# Altium PCB PCB1.PcbDoc
Units mil, origin at the board's own origin, x right, y up, seen from the top; angles counter-clockwise.
Board outline 2735 x 3655 mil, 2 copper layers (Top Layer, Bottom Layer); 9 components, 46 nets, 93 pads, 26 vias.
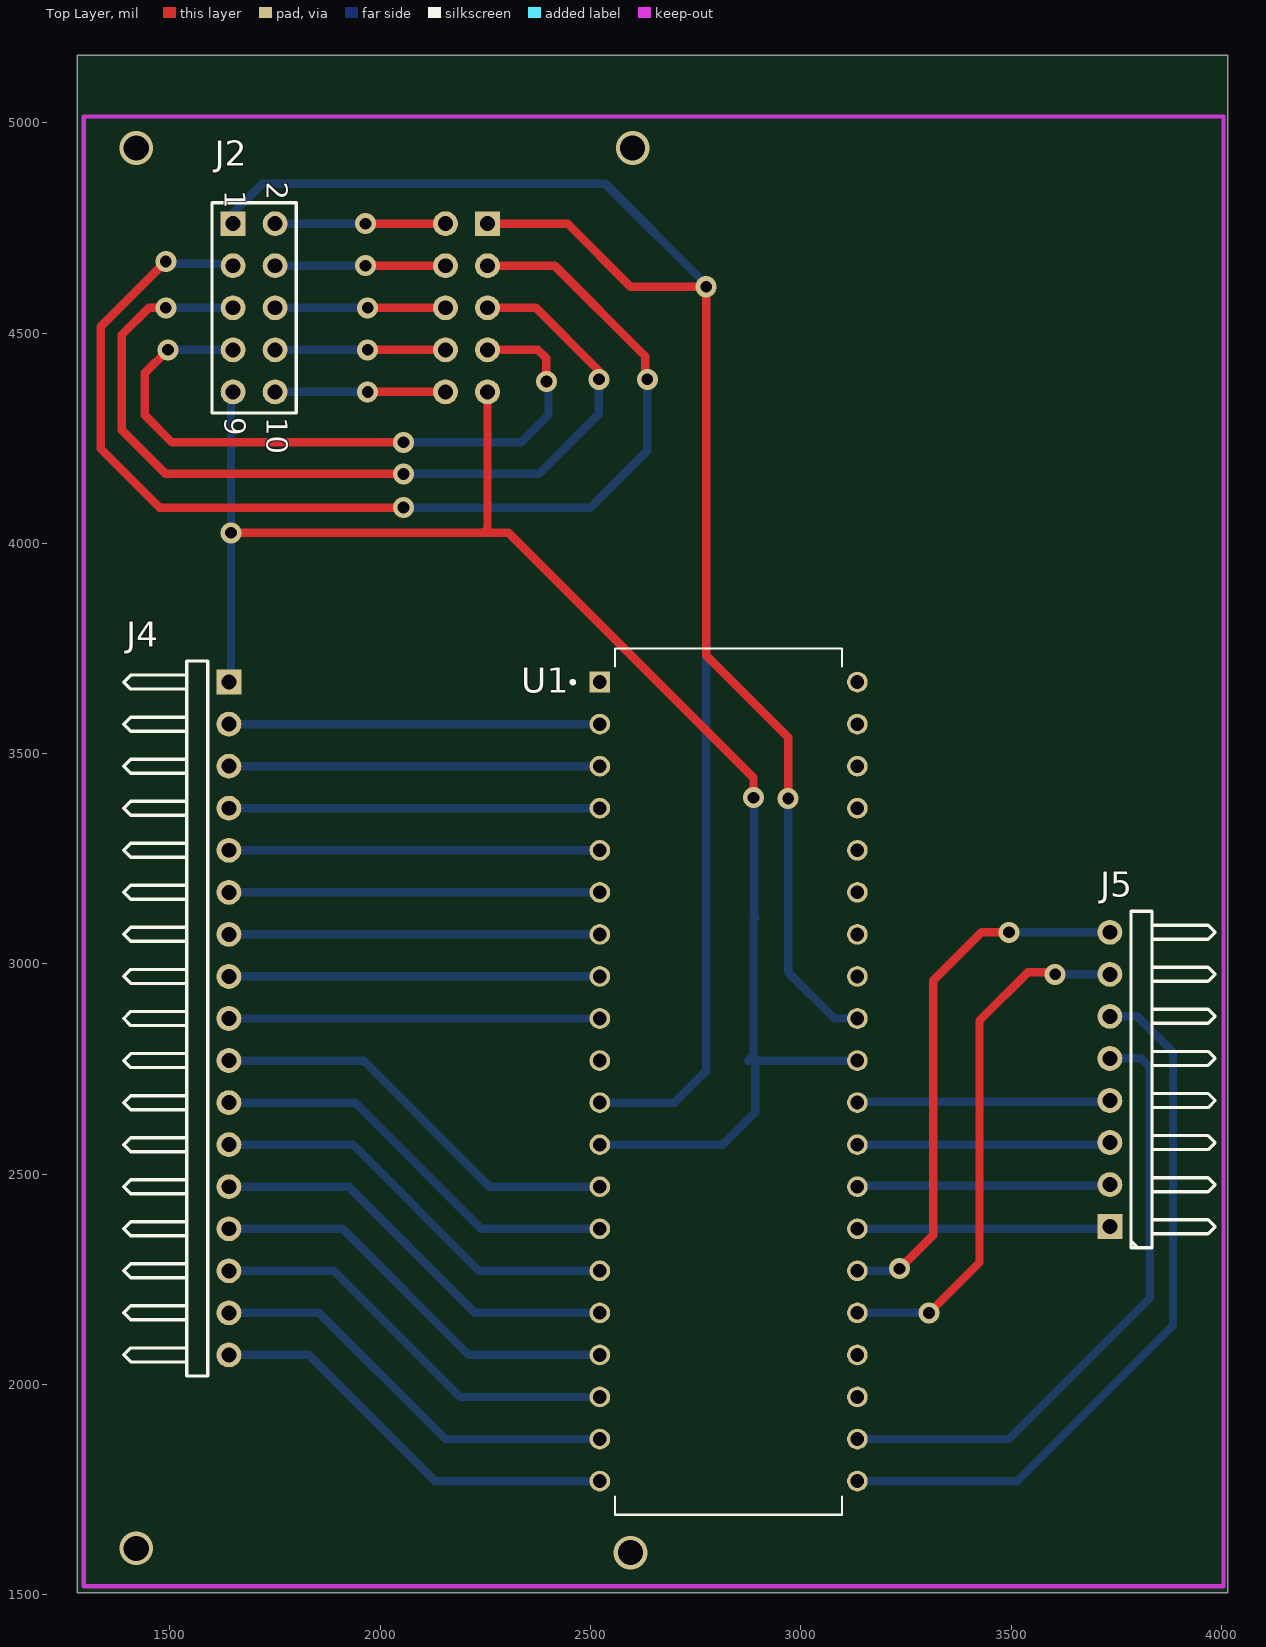
[diagram p0: Top Layer view]
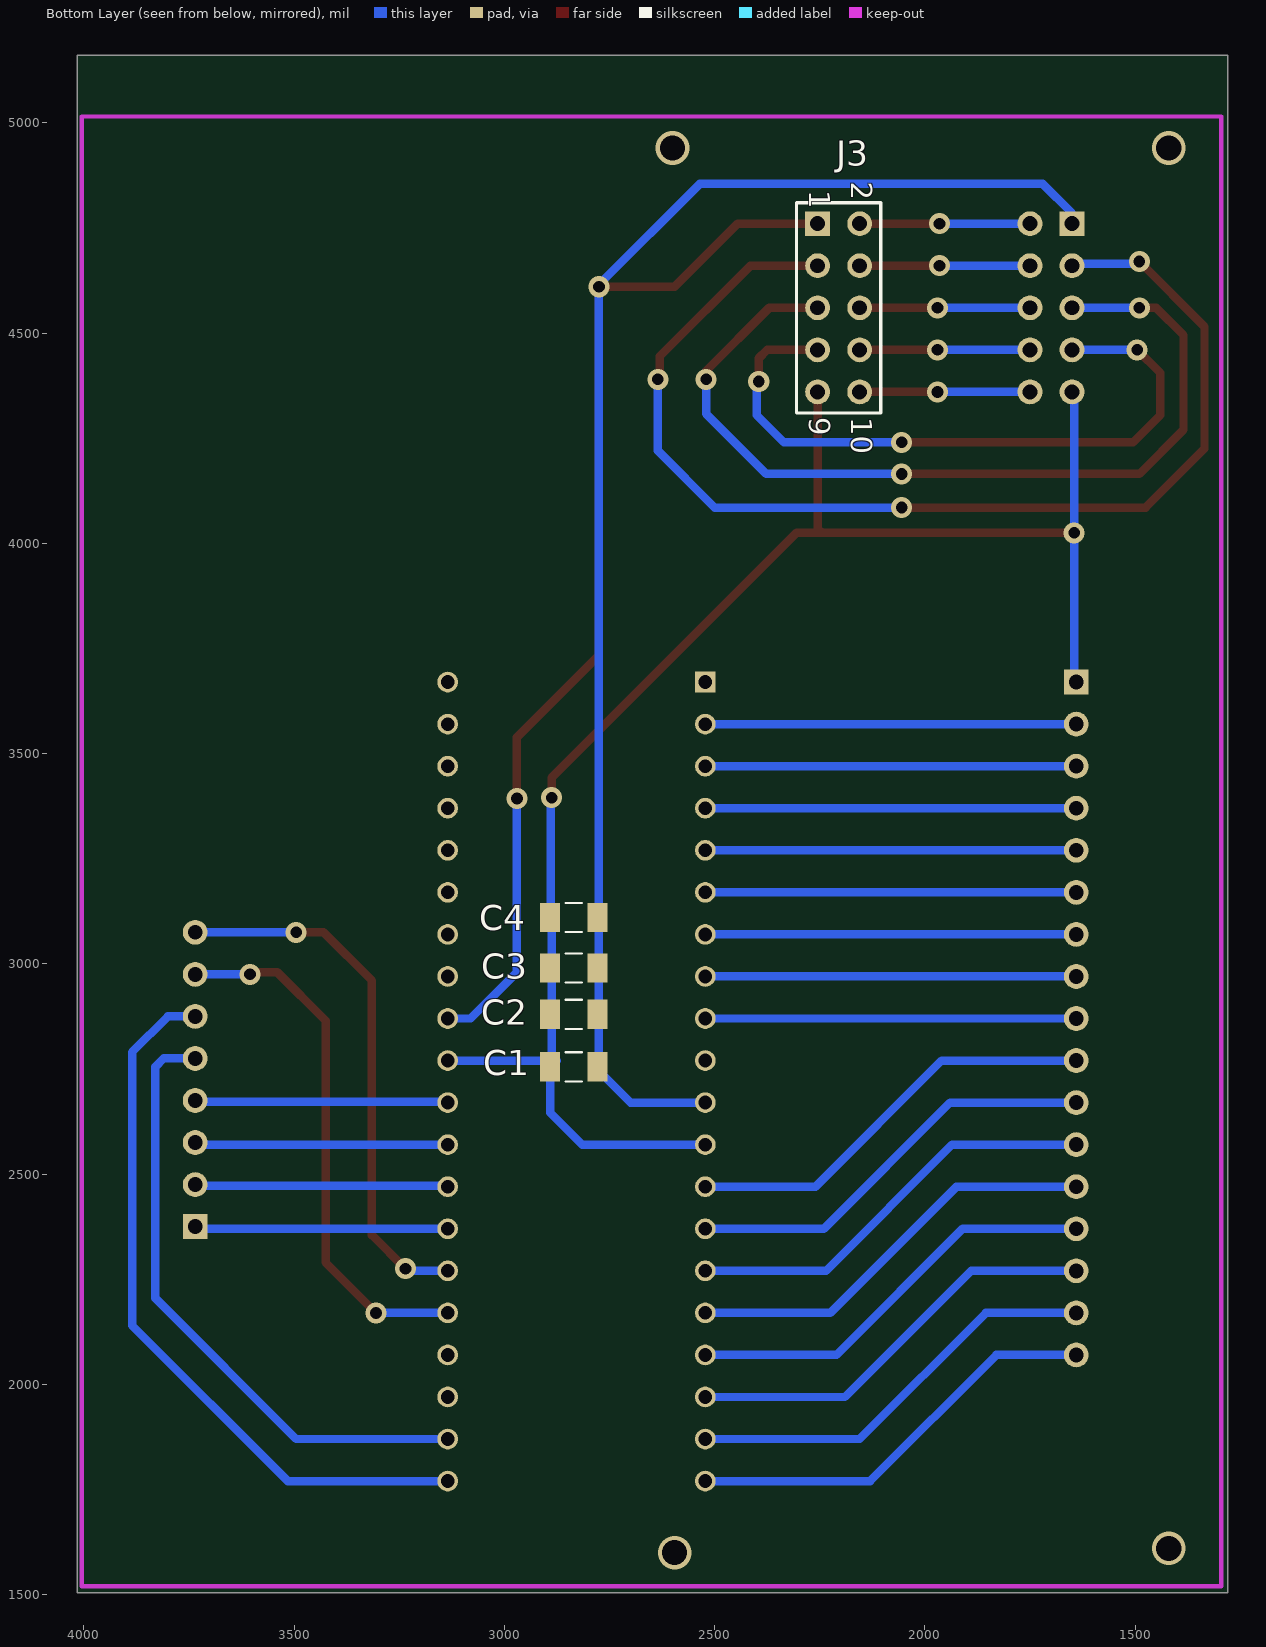
[diagram p1: Bottom Layer view, seen from below]
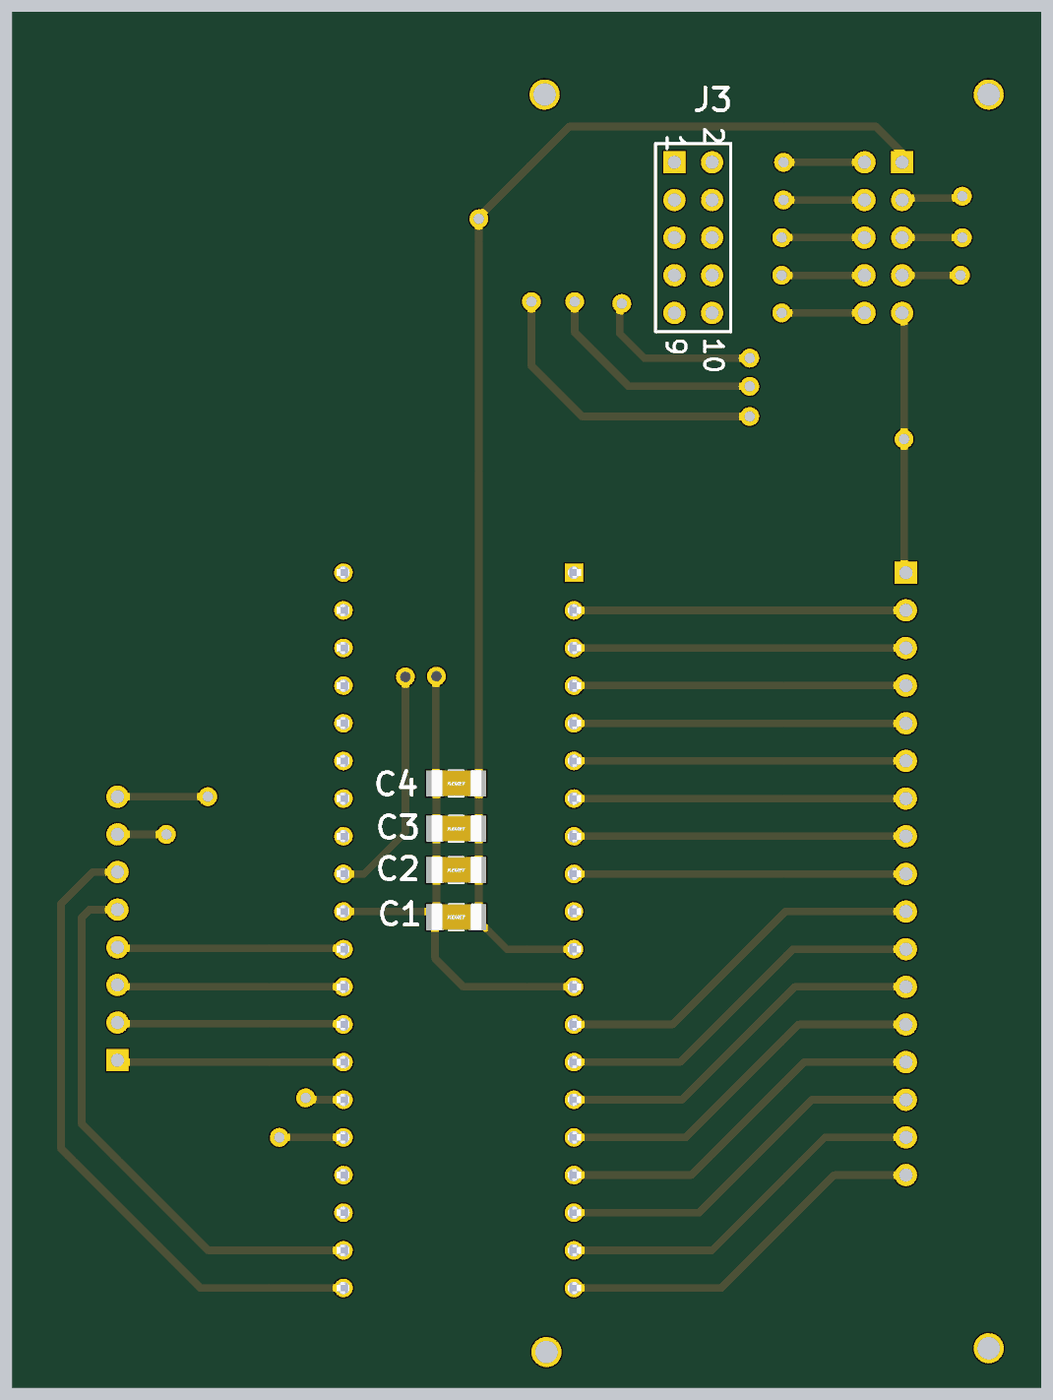
[diagram p2: 3D render of the assembled board from below, using the file's embedded part models]

## Layer stack, top to bottom
Top Solder: solder mask 0.4, Solder Resist, Dk 3.5
Top Layer: signal copper 1.4
Dielectric 1: dielectric 12.6, FR-4, Dk 4.8
Bottom Layer: signal copper 1.4
Bottom Solder: solder mask 0.4, Solder Resist, Dk 3.5

## Board outline
1280,1505 4015,1505 4015,5160 1280,5160

## Design rules (kind name [scope] priority, off if disabled: settings)
Clearance [All] p1: gap=10 ignorepadtopadclearanceinfootprint=FALSE except(0: Arc-Hole Track-Hole SMDPad-Hole THPad-Hole Via-Hole Fill-Hole Poly-Hole Region-Hole Text-Hole)
PolygonConnect [All] p1: connectstyle=Relief reliefconductorwidth=10 reliefentries=4 polygonreliefangle="90 Angle" airgapwidth=10
RoutingVias [All] p1: holewidth=60 width=80 viastyle="Through Hole" minholewidth=60 minwidth=80 maxholewidth=60 maxwidth=80
SolderMaskExpansion [All] p1: expansion=4
Width [All] p1: maxlimit=30 minlimit=20 preferedwidth=20 minimp=50.000000 maximp=50.000000 favimp=50.000000
30 further rules are at their usual default settings.

## Classes and differential pairs
component class Sheet1: C1 C2 C3 C4 J2 J3 J4 U1

## Components (designator, comment, footprint, x,y, rotation, side; value= is the part's Value field where it differs from the comment)
C1 "MLCC - SMD 1206" "MLCC SMD 1206" 2835,2755 r180 bottom
C2 "MLCC - SMD 1206" "MLCC SMD 1206" 2835,2880 r180 bottom
C3 "MLCC - SMD 1206" "MLCC SMD 1206" 2835,2990 r180 bottom
C4 "MLCC - SMD 1206" "MLCC SMD 1206" 2835,3110 r180 bottom
J2 "Header 5X2" HDR2X5 1650,4760 r270 top
J3 "Header 5X2" HDR2X5 2255,4760 r270 bottom
J4 "Header 17H" HDR1X17H 1640,3670 r270 top
J5 "Header 8H" HDR1X8H 3735,2375 r90 top
U1 "PIC16F18875" PIC16F18875 2828.3,2720 r0 top

## Footprints (in the part's own frame and the unit in brackets; to place one, negate y for a bottom-side part, rotate by r counter-clockwise, add the part's x,y. Pads: shape width x height; smd on the part's side, far side on the other; paste and mask are expansions set on the pad)
HDR1X8H [mm] "Connector; Header; 8 Position; Right Angle"
  rect 1.5x1.5 hole 0.9: 1(0,0)
  round 1.5 hole 0.9: 2(2.54,0) 3(5.08,0) 4(7.62,0) 5(10.16,0) 6(12.7,0) 7(15.24,0) 8(17.78,0)
  silkscreen extent -1.27,-6.35 19.05,-1.27
HDR1X17H [mm] "Connector; Header; 17 Position; Right Angle"
  rect 1.5x1.5 hole 0.9: 1(0,0)
  round 1.5 hole 0.9: 2(2.54,0) 3(5.08,0) 4(7.62,0) 5(10.16,0) 6(12.7,0) 7(15.24,0) 8(17.78,0) 9(20.32,0) 10(22.86,0) 11(25.4,0) 12(27.94,0) 13(30.48,0) 14(33.02,0) 15(35.56,0) 16(38.1,0) 17(40.64,0)
  silkscreen extent -1.27,-6.35 41.91,-1.27
HDR2X5 [mm] "Connector; Header; 5x2 Position"
  rect 1.5x1.5 hole 0.9: 1(0,0)
  round 1.5 hole 0.9: 2(0,2.54) 3(2.54,0) 4(2.54,2.54) 5(5.08,0) 6(5.08,2.54) 7(7.62,0) 8(7.62,2.54) 9(10.16,0) 10(10.16,2.54)
  silkscreen extent -1.27,-1.27 11.43,3.81
"MLCC SMD 1206" [mm]
  rect 1.21x1.77 smd: 1(-1.428,0) 2(1.428,0)
  silkscreen extent -0.5,-0.88 0.5,0.88, body extent -1.68,-0.88 1.72,0.92, height 1.8
PIC16F18875 [mm] "40-pin PDIP"
  rect 1.25x1.25 hole 0.83: 1(-7.779,24.13)
  round 1.25 hole 0.83: 2(-7.779,21.59) 3(-7.779,19.05) 4(-7.779,16.51) 5(-7.779,13.97) 6(-7.779,11.43) 7(-7.779,8.89) 8(-7.779,6.35) 9(-7.779,3.81) 10(-7.779,1.27) 11(-7.779,-1.27) 12(-7.779,-3.81) 13(-7.779,-6.35) 14(-7.779,-8.89) 15(-7.779,-11.43) 16(-7.779,-13.97) 17(-7.779,-16.51) 18(-7.779,-19.05) 19(-7.779,-21.59) 20(-7.779,-24.13) 21(7.779,-24.13) 22(7.779,-21.59) 23(7.779,-19.05) 24(7.779,-16.51) 25(7.779,-13.97) 26(7.779,-11.43) 27(7.779,-8.89) 28(7.779,-6.35) 29(7.779,-3.81) 30(7.779,-1.27) 31(7.779,1.27) 32(7.779,3.81) 33(7.779,6.35) 34(7.779,8.89) 35(7.779,11.43) 36(7.779,13.97) 37(7.779,16.51) 38(7.779,19.05) 39(7.779,21.59) 40(7.779,24.13)
  silkscreen extent -9.5,-26.16 6.86,26.16, body extent -8.25,-26.16 8.25,26.16, height 4.83

## Part data
C1 C2 C3 C4: "50V"
J2 J3: "Header, 5-Pin, Dual row", LatestRevisionDate=17-Jul-2002, LatestRevisionNote="Re-released for DXP Platform.", Publisher="Altium Limited"
J4: "Header, 17-Pin, Right Angle", LatestRevisionDate=17-Jul-2002, LatestRevisionNote="Re-released for DXP Platform.", Publisher="Altium Limited"
J5: "Header, 8-Pin, Right Angle", ComponentLink1Description=teclado, ComponentLink1URL=https://docs.rs-online.com/5497/0900766b80bf4f45.pdf, LatestRevisionDate=17-Jul-2002, LatestRevisionNote="Re-released for DXP Platform.", Publisher="Altium Limited"
U1: "40-pin PDIP", ComponentLink1Description=Datasheet, ComponentLink1URL=https://ww1.microchip.com/downloads/en/DeviceDoc/PIC16(L)F18855-75-Data-Sheet-40001802H.pdf, ComponentLink2Description="Development Kit", ComponentLink2URL=https://docs.rs-online.com/cec5/0900766b8152ff63.pdf

## Via types
v1: diameter 50, hole 28, Top Layer to Bottom Layer, 22 vias
v2: diameter 80, hole 60, Top Layer to Bottom Layer, 4 vias

## Nets (pads, with @x,y where several pads share a name; then routed paths per layer and width w, separated by ;. In a path a pad name is that pad's centre, name@x,y a point inside that pad or via, vN(x,y) a via of type N, cw(c..) or ccw(c..) an arc to the next point about the centre after c; other vN are vias at no path point)
+5: C1.2 C2.2 C3.2 C4.2 J2.1 J3.1 U1.11 U1.32 | length 5935.5
  Top Layer w20: J3.1 2445,4760 2595,4610 v1(2775,4610) 2775,3733.78 2970,3538.78 v1(2970,3393.11)
  Bottom Layer w20: J2.1 1650,4785 1720,4855 2535,4855 2775,4615 2775,3730 2775,3136.22 2775,2880 2775,2745 2700,2670 U1.11 ; v1(2970,3393.11) 2970,2980 3079.95,2870.05 3134.51,2870.05 U1.32
GND: C1.1 C2.1 C3.1 C4.1 J2.9 J3.9 J4.1 U1.12 U1.31 | length 3965.3
  Top Layer w20: v1(1645,4025) 2245,4025 ; J3.9 2255,4035 2245,4025 ; v1(2887.44,3395) 2887.44,3442.56 2305,4025 2245,4025
  Bottom Layer w20: J4.1 1645,3675 v1(1645,4025) 1645,4355 J2.9 ; U1.12 2815,2570 2891.22,2646.22 C1.1 ; C4.1@2887.44,3110 2887.44,2782.4 2875.04,2770 U1.31 ; v1(2887.44,3395) 2889.33,3393.11 2889.33,3111.89 C4.1
NetJ1_1: U1.1
NetJ1_2: J4.2 U1.2 | length 882
  Bottom Layer w20: J4.2 U1.2
NetJ1_3: J4.3 U1.3 | length 882
  Bottom Layer w20: J4.3 U1.3
NetJ1_4: J4.4 U1.4 | length 882
  Bottom Layer w20: J4.4 U1.4
NetJ1_5: J4.5 U1.5 | length 882
  Bottom Layer w20: J4.5 U1.5
NetJ1_6: J4.6 U1.6 | length 882
  Bottom Layer w20: J4.6 U1.6
NetJ1_7: J4.7 U1.7 | length 882
  Bottom Layer w20: J4.7 U1.7
NetJ1_9: J4.10 U1.13 | length 1006.3
  Bottom Layer w20: J4.10 1960,2770 2260,2470 U1.13
NetJ1_10: J4.11 U1.14 | length 1006.3
  Bottom Layer w20: J4.11 1940,2670 2240,2370 U1.14
NetJ1_11: J4.12 U1.15 | length 1006.3
  Bottom Layer w20: J4.12 1935,2570 2235,2270 U1.15
NetJ1_12: J4.13 U1.16 | length 1006.3
  Bottom Layer w20: J4.13 1925,2470 2225,2170 U1.16
NetJ1_13: J4.14 U1.17 | length 1006.3
  Bottom Layer w20: J4.14 1910,2370 2210,2070 U1.17
NetJ1_14: J4.15 U1.18 | length 1006.3
  Bottom Layer w20: J4.15 1890,2270 2190,1970 U1.18
NetJ1_15: U1.23
NetJ1_16: U1.24
NetJ1_17: J5.7 U1.25 | length 1284.9
  Top Layer w20: v1(3305,2170) 3425,2290 3425,2865 3540,2980 3600,2980 v1(3605,2975)
  Bottom Layer w20: U1.25 v1(3305,2170) v1@3315,2170 ; v1(3605,2975) J5.7
NetJ1_18: J5.8 U1.26 | length 1288.3
  Top Layer w20: v1(3235,2275) 3315,2355 3315,2960 3430,3075 v1(3495,3075)
  Bottom Layer w20: U1.26 3230,2270 v1(3235,2275) ; v1(3495,3075) J5.8
NetJ1_21: U1.33
NetJ1_22: U1.34
NetJ1_23: U1.35
NetJ1_24: U1.36
NetJ1_25: U1.37
NetJ1_26: U1.38
NetJ1_27: U1.39
NetJ1_28: U1.40
NetJ2_2: J2.2 J3.2 | length 405
  Top Layer w20: v1(1965,4760) J3.2
  Bottom Layer w20: J2.2 v1(1965,4760)
NetJ2_3: J2.3 J3.3 | length 2768.4
  Top Layer w20: v1(1490,4670) 1335,4515 1335,4225 1475,4085 v1(2055,4085) ; J3.3 2415,4660 2630,4445 2630,4395 v1(2635,4390)
  Bottom Layer w20: v1(1490,4670) 1495,4665 1645,4665 J2.3 ; v1(2055,4085) 2500,4085 2635,4220 v1@2635,4380
NetJ2_4: J2.4 J3.4 | length 405
  Top Layer w20: v1(1965,4660) J3.4
  Bottom Layer w20: J2.4 v1(1965,4660)
NetJ2_5: J2.5 J3.5 | length 2173.8
  Top Layer w20: v1(1490,4560) 1450,4560 1385,4495 1385,4270 1490,4165 v1(2055,4165) ; J3.5 2370,4560 2520,4410 v1(2520,4390)
  Bottom Layer w20: v1(1490,4560) J2.5 ; v1(2055,4165) 2377.04,4165 2520,4307.96 v1@2520,4380
NetJ2_6: J2.6 J3.6 | length 405
  Top Layer w20: v1(1970,4560) J3.6
  Bottom Layer w20: J2.6 v1(1970,4560)
NetJ2_7: J2.7 J3.7 | length 1632
  Top Layer w20: v1(1495,4460) 1440,4405 1440,4305 1505,4240 v1(2055,4240) ; J3.7 2375,4460 2395,4440 v1(2395,4385)
  Bottom Layer w20: v1(1495,4460) J2.7 ; v1(2055,4240) 2335,4240 2400,4305 2400,4380 v1(2395,4385)
NetJ2_8: J2.8 J3.8 | length 405
  Top Layer w20: v1(1970,4460) J3.8
  Bottom Layer w20: J2.8 v1(1970,4460)
NetJ2_10: J2.10 J3.10 | length 405
  Top Layer w20: v1(1970,4360) J3.10
  Bottom Layer w20: J2.10 v1(1970,4360)
NetJ4_8: J4.8 U1.8 | length 882
  Bottom Layer w20: J4.8 U1.8
NetJ4_9: J4.9 U1.9 | length 882
  Bottom Layer w20: J4.9 U1.9
NetJ4_16: J4.16 U1.19 | length 1006.3
  Bottom Layer w20: J4.16 1855,2170 2155,1870 U1.19
NetJ4_17: J4.17 U1.20 | length 1006.3
  Bottom Layer w20: J4.17 1830,2070 2130,1770 U1.20
NetJ5_1: J5.1 U1.27 | length 609.6
  Bottom Layer w20: U1.27@3139.56,2375 U1.27 3730,2370 J5.1
NetJ5_2: J5.2 U1.28 | length 602.5
  Bottom Layer w20: U1.28 3137.06,2472.5 3732.5,2472.5 J5.2
NetJ5_3: J5.3 U1.29 | length 609.6
  Bottom Layer w20: U1.29@3139.56,2575 U1.29 3730,2570 J5.3
NetJ5_4: J5.4 U1.30 | length 602.5
  Bottom Layer w20: U1.30 3137.06,2672.5 3732.5,2672.5 J5.4
NetJ5_5: J5.5 U1.22 | length 1487.5
  Bottom Layer w20: U1.22 3495,1870 3830,2205 3830,2755 3810,2775 J5.5
NetJ5_6: J5.6 U1.21 | length 1746
  Bottom Layer w20: U1.21 3515,1770 3885,2140 3885,2790 3800,2875 J5.6 J5.6@3740,2880
NetU1_10: U1.10
copper on no net:
  other v2: 2595,1600 1420,1610 1420,4940 2600,4940

## Keep-outs
Keep-Out Layer:
  lines w10: 1295,1520 4005,1520 4005,5015 1295,5015 1295,1520

## Text inside footprints (layer, text, board x,y; h text height)
J2: Top Overlay "10" at 1730,4300 h50 r270; Top Overlay "9" at 1630,4300 h50 r270; Top Overlay "1" at 1630,4840 h50 r270; Top Overlay "2" at 1730,4860 h50 r270
J3: Bottom Overlay "10" at 2175,4300 h50 r90; Bottom Overlay "9" at 2275,4300 h50 r90; Bottom Overlay "1" at 2275,4840 h50 r90; Bottom Overlay "2" at 2175,4860 h50 r90